# Altium PCB sun_siphon.PcbDoc
Units mm, origin at the board's own origin, x right, y up, seen from the top; angles counter-clockwise.
Board outline 150.05 x 185 mm, 2 copper layers (Top Layer, Bottom Layer), stack 1.671 mm thick; 11 components, 7 nets, 42 pads, 0 vias.
Unrouted connection lines stored in the file: 7.
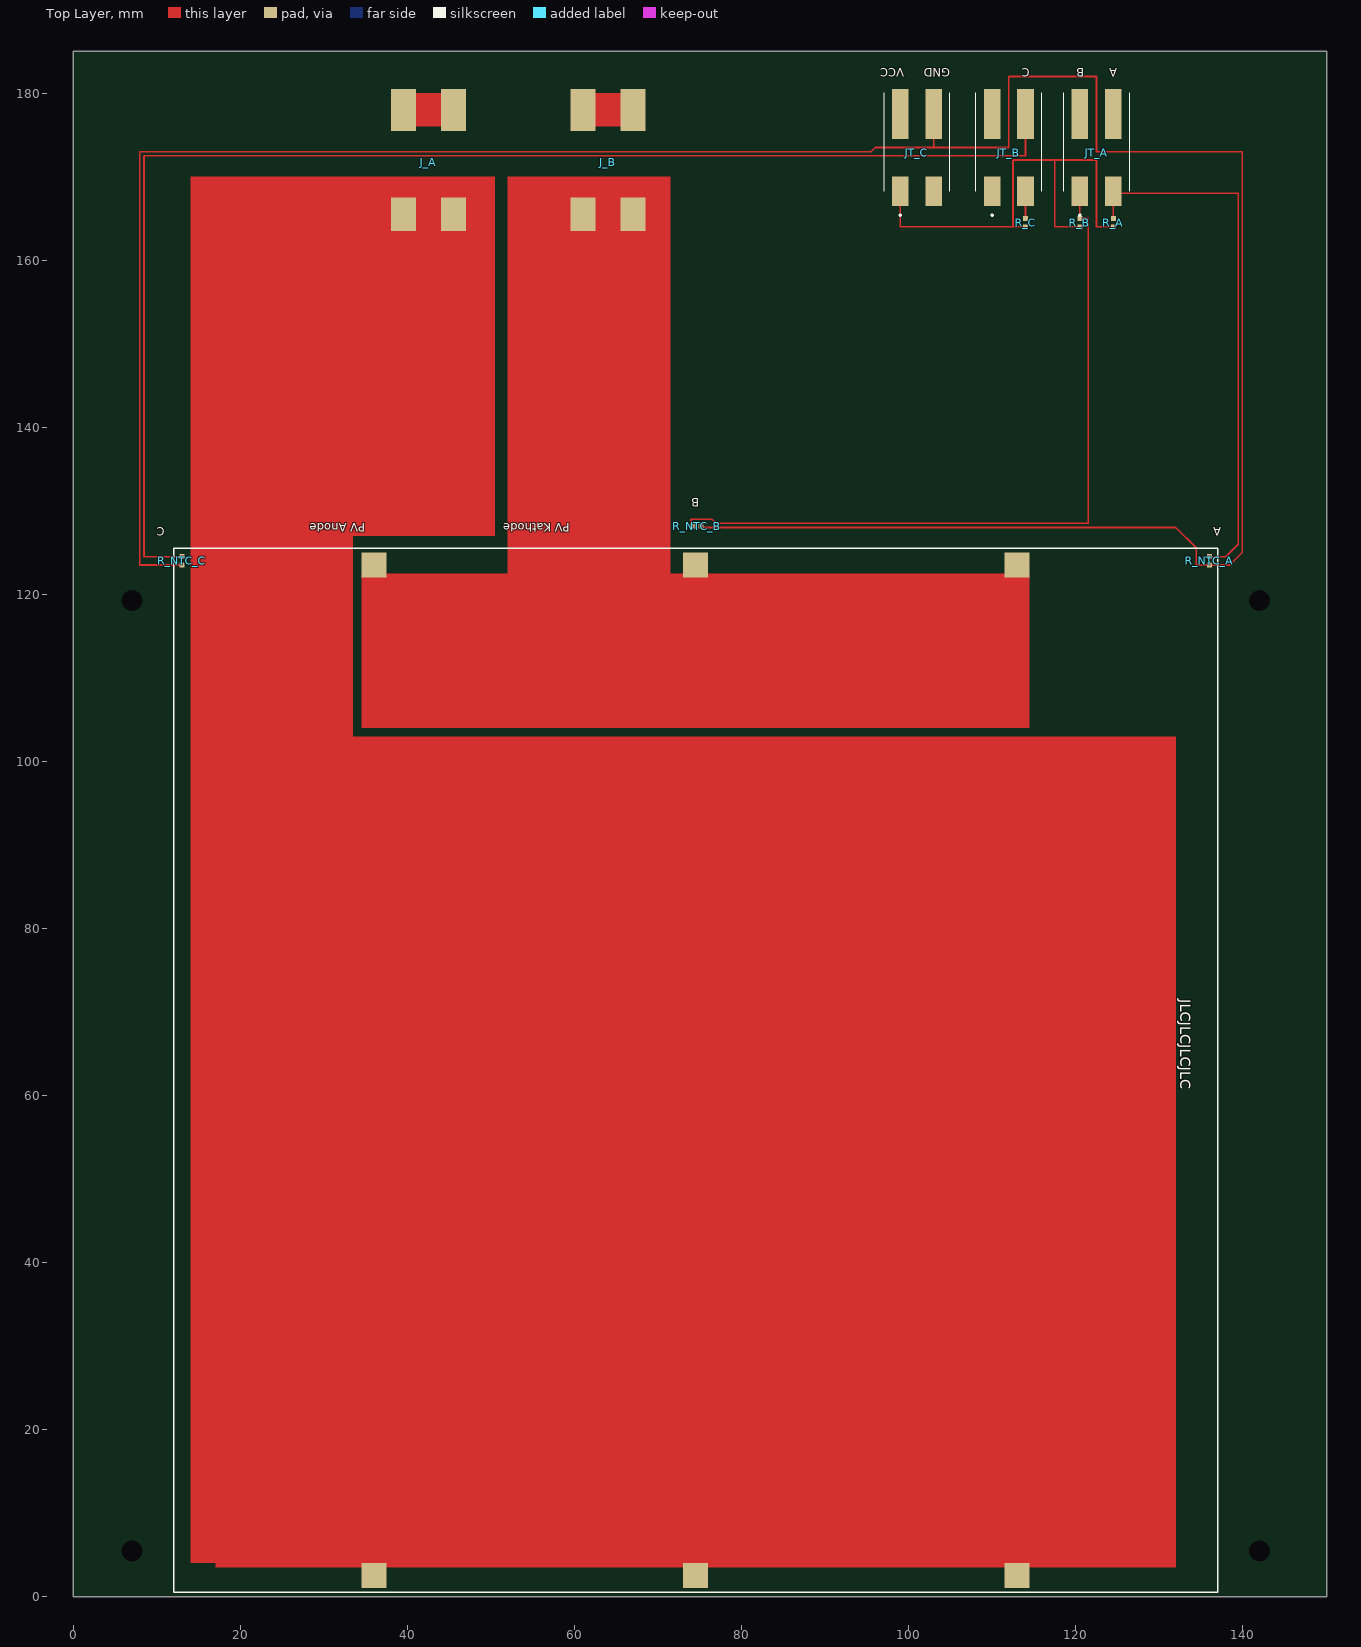
[diagram p0: Top Layer view]
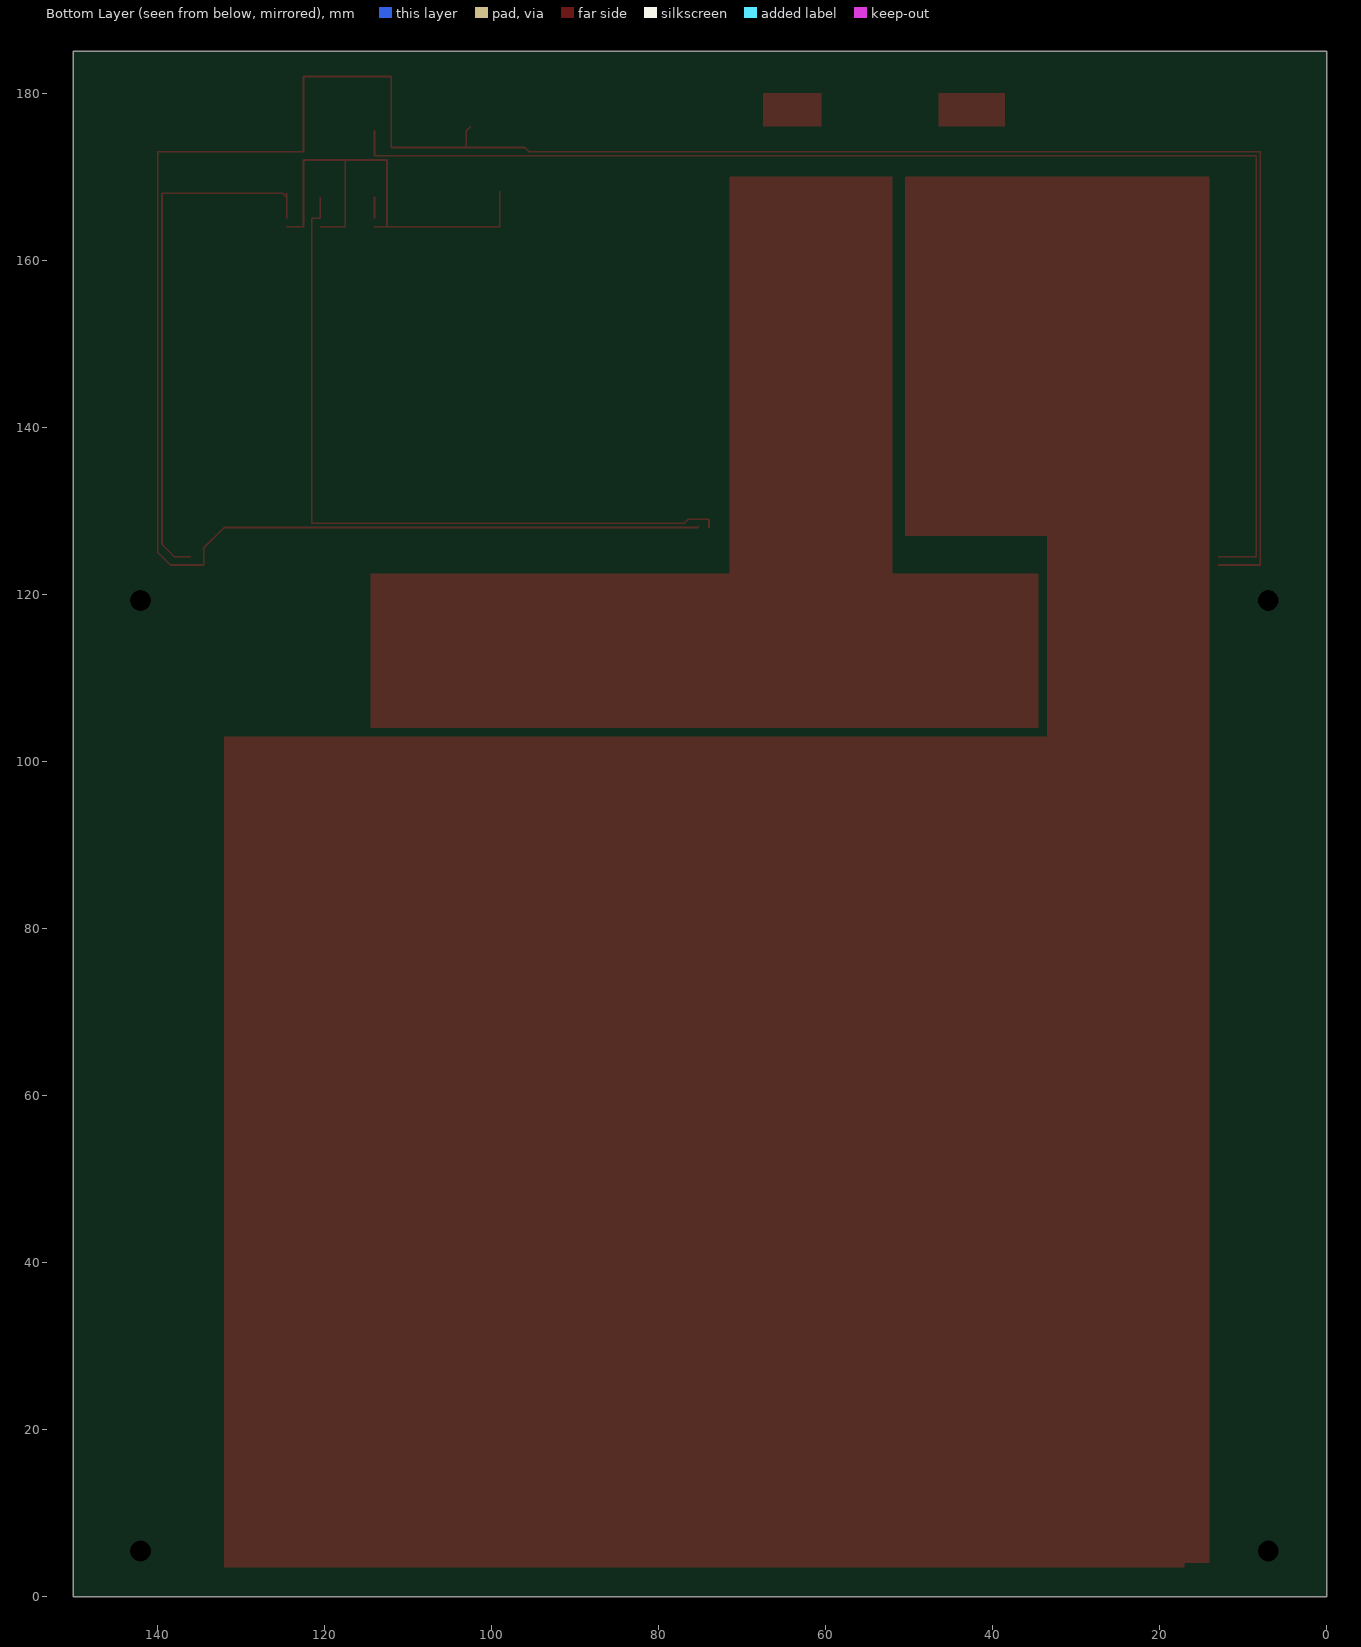
[diagram p1: Bottom Layer view, seen from below]
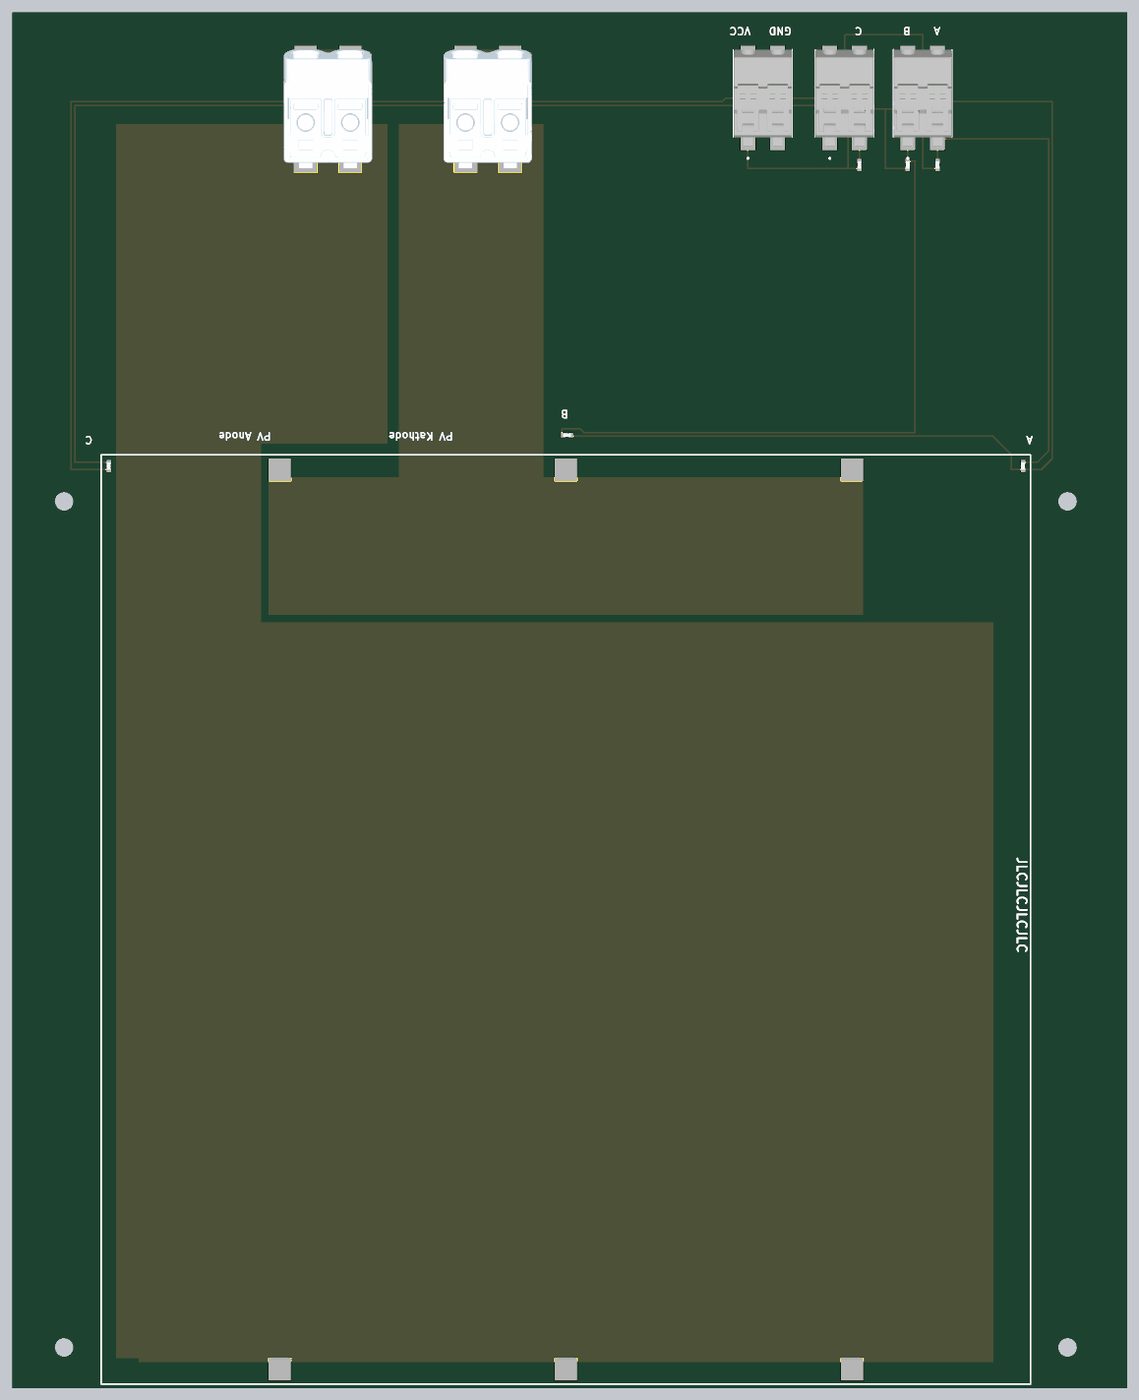
[diagram p2: 3D render of the assembled board from above, using the file's embedded part models]

## Layer stack, top to bottom
Top Solder: solder mask 0.0102, Solder Resist, Dk 3.5
Top Layer: signal copper 0.0356
Dielectric 1: core 1.6, Aluminum, Dk 4.2
Bottom Layer: signal copper 0.0356
Bottom Solder: solder mask 0.0102, Solder Resist, Dk 3.5

## Board outline
0,0 0,185 150.05,185 150.05,0

## Design rules (kind name [scope] priority, off if disabled: settings)
Clearance [All] p1: gap=0.2 ignorepadtopadclearanceinfootprint=FALSE except(0: Arc-Hole Track-Hole SMDPad-Hole THPad-Hole Via-Hole Fill-Hole Poly-Hole Region-Hole Text-Hole)
PolygonConnect [All] p1: thpad.connectstyle=Relief thpad.reliefconductorwidth=0.254 thpad.reliefentries=4 thpad.polygonreliefangle="90 Angle" thpad.airgapwidth=0.254 smdpad.connectstyle=Relief smdpad.reliefconductorwidth=0.254 smdpad.reliefentries=4 smdpad.polygonreliefangle="90 Angle" smdpad.airgapwidth=0.254 via.connectstyle=Direct via.reliefconductorwidth=0.254 via.reliefentries=4 via.polygonreliefangle="90 Angle" via.airgapwidth=0.254
RoutingVias [All] p1: holewidth=0.711 width=1.27 viastyle="Through Hole" minholewidth=0.711 minwidth=1.27 maxholewidth=0.711 maxwidth=1.27
SolderMaskExpansion [All] p1: expansion=0.102
Width [All] p1: maxlimit=1 minlimit=0.2 preferedwidth=0.2 minimp=50.000000 maximp=50.000000 favimp=50.000000
30 further rules are at their usual default settings.

## Components (designator, comment, footprint, x,y, rotation, side; value= is the part's Value field where it differs from the comment)
J_A "351402" Adels-Contact_351402 42.5,172 r0 top
J_B "351402" Adels-Contact_351402 64,172 r0 top
JT_A "*" MOLEX_1041880210 122.5,173.5 r90 top
JT_B "*" MOLEX_1041880210 112,173.5 r90 top
JT_C "*" MOLEX_1041880210 101,173.5 r90 top
R_A "0402WGF1002TCE" R_0402 124.5,164.5 r90 top value=10k
R_B "0402WGF1002TCE" R_0402 120.5,164.5 r90 top value=10k
R_C "0402WGF1002TCE" R_0402 114,164.5 r90 top value=10k
R_NTC_A "NCP15XH103F03RC" R_0402 136,124 r90 top value=10k
R_NTC_B "NCP15XH103F03RC" R_0402 74.66,128.16 r180 top value=10k
R_NTC_C "NCP15XH103F03RC" R_0402 13,124 r90 top value=10k

## Footprints (in the part's own frame and the unit in brackets; to place one, negate y for a bottom-side part, rotate by r counter-clockwise, add the part's x,y. Pads: shape width x height; smd on the part's side, far side on the other; paste and mask are expansions set on the pad)
Adels-Contact_351402 [mm]
  rect 3x4 smd: 1(-3,-6.5) 2(3,-6.5)
  rect 3x5 smd: 1(-3,6) 2(3,6)
  body extent -5.95,-7.95 5.95,8, height 7.05
MOLEX_1041880210 [mm]
  rect 3.5x2 smd: 1(-5.25,2) 2(-5.25,-2)
  rect 6x2 smd: 1(4,2) 2(4,-2)
  silkscreen extent -8.21,-3.95 6.55,3.95, body extent -6.5,-3.96 6.5,3.94, height 4.25
R_0402 [mm] "Body 1.0 x 0.5 mm (LxW typ)"
  rect 0.6x0.6 smd: 1(-0.508,0) 2(0.508,0)
  body extent -0.5,-0.25 0.5,0.25, height 0.35

## Part data
J_A J_B: "J - JACK - POWER - SMDflat 545/ 2 - RIGHT - MALE", JLC Availability=None, LCSC Part #=X
JT_A JT_B JT_C: "J - JACK - POWER - MOLEX 1041880210", JLC Availability=Extended, LCSC Part #=C565283
R_A R_B R_C: "R - RESISTOR - SMD - 10k - 1% - 0402", JLC Availability=Basic, LCSC Part #=C25744
R_NTC_A R_NTC_B R_NTC_C: "RT - NTC THERMISTOR - 10k - 1% - 0402", JLC Availability=Extended, LCSC Part #=C77131, Value2=3380k

## Free pads (board coordinates)
  rect 3x3 smd: 13(36,2.5) 13(36,123.5) 13(74.5,2.5) 13(74.5,123.5) 13(113,2.5) 13(113,123.5)
  round 1.524 hole 2.5 unplated: 14(7,5.45) 14(7,119.25) 14(142,5.45) 14(142,119.25)

## Nets (pads, with @x,y where several pads share a name; then routed paths per layer and width w, separated by ;. In a path a pad name is that pad's centre, name@x,y a point inside that pad or via, vN(x,y) a via of type N, cw(c..) or ccw(c..) an arc to the next point about the centre after c; other vN are vias at no path point)
GND: JT_C.2 R_NTC_A.1 R_NTC_B.1 R_NTC_C.1 | length 323.6
  Top Layer w0.2: R_NTC_C.1@13,123.5 7.95,123.5 7.95,173 95.5,173 96,173.5 103,173.5 ; R_NTC_B.1 75.328,128 132,128 134.5,125.5 134.45,125.5 134.45,123.5 138.45,123.5 139.95,125 139.95,173 122.5,173 122.5,182 112,182 112,173.5 103,173.5 ; JT_C.2@102.5,176 103,175.5 103,173.5
NetLabel225: J_A.1 J_A.2 pad.13@36,2.5 pad.13@74.5,2.5 pad.13@113,2.5
NetLabel226: J_B.1 J_B.2 pad.13@36,123.5 pad.13@74.5,123.5 pad.13@113,123.5
TS_0: JT_A.2 R_A.2 R_NTC_A.2 | length 64.2
  Top Layer w0.2: R_A.2 JT_A.2@124.5,167.5 ; JT_A.2@124.5,168 JT_A.2@124.5,167.5 ; R_NTC_A.2@136,124.5 137.95,124.5 139.45,126 139.45,168 125,168 JT_A.2@124.5,167.5
TS_1: JT_A.1 R_B.2 R_NTC_B.2 | length 89.2
  Top Layer w0.2: R_NTC_B.2@73.95,128 73.95,129 76.45,129 76.95,128.5 ; 77,128.5 111.45,128.5 ; 111,128.5 121.5,128.5 121.5,165 121.508,165.008 R_B.2 JT_A.1@120.5,167.5
TS_2: JT_B.2 R_C.2 R_NTC_C.2 | length 163.6
  Top Layer w0.2: R_NTC_C.2@13,124.5 8.45,124.5 8.45,172.5 114,172.5 JT_B.2@114,175.5 ; R_C.2 JT_B.2@114,167.5
TS_VCC: JT_C.1 R_A.1 R_B.1 R_C.1 | length 58.3
  Top Layer w0.2: JT_C.1@99,168.25 99,164 112.5,164 ; R_C.1@114,164 112.5,164 ; R_B.1@120.5,164 117.5,164 117.5,172 ; R_A.1 124.492,164 122.5,164 122.5,172 117.5,172 ; 112.5,164 112.5,172 117.5,172
pads on no net: JT_B.1

## Polygon pours and split planes (outlines as drawn)
no net on Top Layer "Top Layer-No Net" (solid, shelved, pour order 0): 114.5,184

## Other copper
Top Layer:
  rectangle net NetLabel226: 60.5,176 67.5,180
  rectangle net NetLabel225: 38.5,176 46.5,180
  rectangle net NetLabel225: 14,127 50.5,170
  rectangle net NetLabel226: 52,115.5 71.5,170
  rectangle net NetLabel226: 34.5,104 114.5,122.5
  rectangle net NetLabel225: 14,4 33.5,135
  region net NetLabel225: 17,103 17,3.5 132,3.5 132,103

## Silkscreen, mask and mechanical layers (free items; w line width, h text height)
Top Overlay:
  lines w0.2: 12,0.5 137,0.5 137,125.5 12,125.5 12,0.5
  text "VCC" at 99.5,183 h1 r180
  text "GND" at 105,183 h1 r180
  text "C" at 114.5,183 h1 r180
  text "B" at 121,183 h1 r180
  text "A" at 125,183 h1 r180
  text "B" at 74.95,131.5 h1 r180
  text "PV Anode" at 34.95,128.5 h1 r180
  text "PV Kathode" at 59.45,128.5 h1 r180
  text "C" at 10.95,128 h1 r180
  text "A" at 137.45,128 h1 r180
  text "JLCJLCJLCJLC" at 132.5,71.5 h1.25 r270
Board Outline (M30):
  the board outline again, w0.1